# Altium PCB PCB3.PcbDoc
Units mm, origin at the board's own origin, x right, y up, seen from the top; angles counter-clockwise.
Board outline 152.4 x 101.6 mm, 2 copper layers (Top Layer, Bottom Layer); 11 components, 11 nets, 25 pads, 0 vias.
Unrouted connection lines stored in the file: 14.
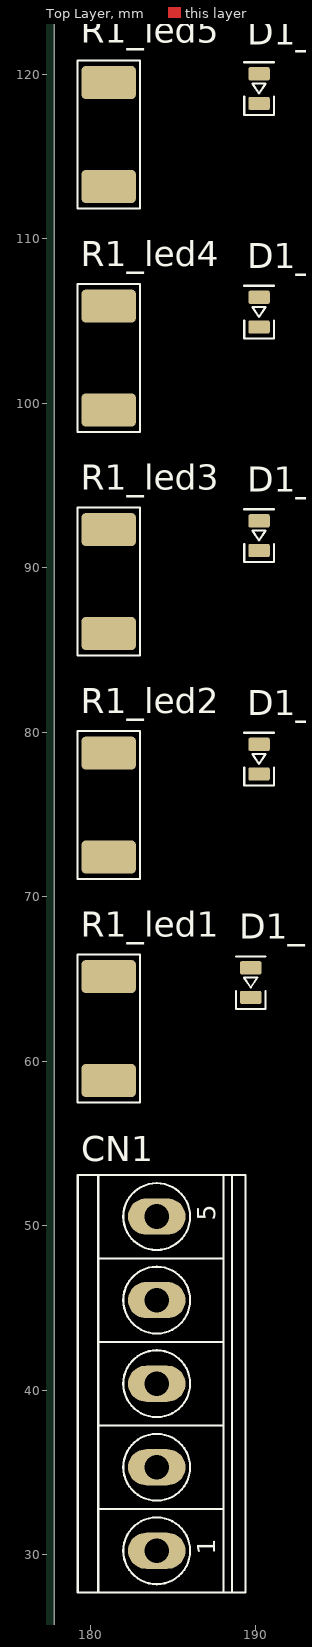
[diagram p0: Top Layer view]
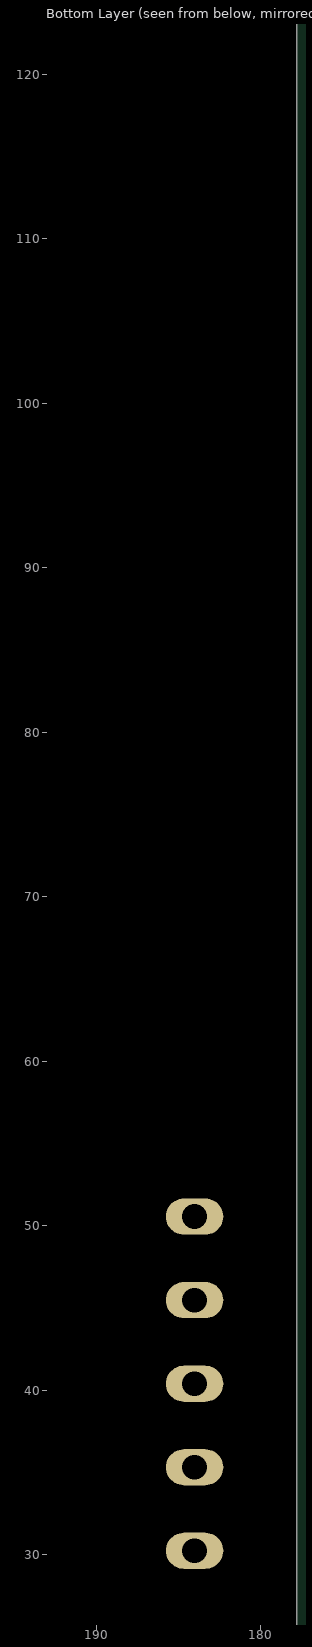
[diagram p1: Bottom Layer view, seen from below]

## Layer stack, top to bottom
Top Solder: solder mask 0.0102, Solder Resist, Dk 3.5
Top Layer: signal copper 0.0356
Dielectric 1: dielectric 0.32, FR-4, Dk 4.8
Bottom Layer: signal copper 0.0356
Bottom Solder: solder mask 0.0102, Solder Resist, Dk 3.5

## Board outline
25.4,25.4 177.8,25.4 177.8,127 25.4,127

## Design rules (kind name [scope] priority, off if disabled: settings)
Clearance [All] p1: gap=0.254 ignorepadtopadclearanceinfootprint=FALSE except(0: Arc-Hole Track-Hole SMDPad-Hole THPad-Hole Via-Hole Fill-Hole Poly-Hole Region-Hole Text-Hole)
PolygonConnect [All] p1: connectstyle=Relief reliefconductorwidth=0.254 reliefentries=4 polygonreliefangle="90 Angle" airgapwidth=0.254
RoutingVias [All] p1: holewidth=0.711 width=1.27 viastyle="Through Hole" minholewidth=0.711 minwidth=1.27 maxholewidth=0.711 maxwidth=1.27
SolderMaskExpansion [All] p1: expansion=0.102 istentingtop=FALSE
Width [All] p1: maxlimit=0.254 minlimit=0.254 preferedwidth=0.254
30 further rules are at their usual default settings.

## Classes and differential pairs
channel class circuito1: led1 led2 led3 led4 led5
net class IN[1..5]: IN1 IN2 IN3 IN4 IN5
component class led5: D1_led5 R1_led5
component class led4: D1_led4 R1_led4
component class led3: D1_led3 R1_led3
component class led2: D1_led2 R1_led2
component class led1: D1_led1 R1_led1
component class Sheet1: CN1

## Components (designator, comment, footprint, x,y, rotation, side; value= is the part's Value field where it differs from the comment)
CN1 "TB-05" TB508-05 184.023,40.386 r90 top
D1_led1 "LED" LED-0805 189.738,64.77 r90 top (schematic designator D1)
D1_led2 "LED" LED-0805 190.246,78.359 r90 top (schematic designator D1)
D1_led3 "LED" LED-0805 190.246,91.948 r90 top (schematic designator D1)
D1_led4 "LED" LED-0805 190.246,105.537 r90 top (schematic designator D1)
D1_led5 "LED" LED-0805 190.246,119.126 r90 top (schematic designator D1)
R1_led1 "1k0" R2512 181.102,61.976 r90 top (schematic designator R1)
R1_led2 "1k0" R2512 181.102,75.565 r90 top (schematic designator R1)
R1_led3 "1k0" R2512 181.102,89.154 r90 top (schematic designator R1)
R1_led4 "1k0" R2512 181.102,102.743 r90 top (schematic designator R1)
R1_led5 "1k0" R2512 181.102,116.332 r90 top (schematic designator R1)

## Footprints (in the part's own frame and the unit in brackets; to place one, negate y for a bottom-side part, rotate by r counter-clockwise, add the part's x,y. Pads: shape width x height; smd on the part's side, far side on the other; paste and mask are expansions set on the pad)
LED-0805 [mm] "SMT LED DIODE 0805"
  rrect25% 0.8x1.3 smd: 1(-0.9,0) 2(0.9,0)
  silkscreen extent -1.6,-0.9 1.6,0.9, body extent -1.01,-0.62 1.01,0.63, height 1.1
R2512 [mm] "SMD RESISTOR 2512"
  rrect25% 2x3.3 smd: 1(-3.159,0) 2(3.16,0)
  silkscreen extent -4.5,-1.9 4.5,1.9, body extent -3.16,-1.6 3.16,1.6, height 0.62
TB508-05 [mm] "Vertical terminal block 0.2 inch (5.08mm) pitch"
  oval 2.2x3.5 hole 1.5: 1(-10.16,0) 2(-5.08,0) 3(0,0) 4(5.08,0) 5(10.16,0)
  silkscreen extent -12.7,-5.4 12.7,4.8, body extent -13.24,-4.78 12.71,4.75, height 15.12

## Part data
CN1: "Terminal Block"
D1_led1 D1_led2 D1_led3 D1_led4 D1_led5: "LED - Light-Emitting Diode"
R1_led1 R1_led2 R1_led3 R1_led4 R1_led5: library part Resistor, "Single resistor", Power=0.125W, Unit price=0.1

## Nets (pads, with @x,y where several pads share a name; then routed paths per layer and width w, separated by ;. In a path a pad name is that pad's centre, name@x,y a point inside that pad or via, vN(x,y) a via of type N, cw(c..) or ccw(c..) an arc to the next point about the centre after c; other vN are vias at no path point)
GND: D1_led1.1 D1_led2.1 D1_led3.1 D1_led4.1 D1_led5.1
IN1: CN1.1 R1_led1.1
IN2: CN1.2 R1_led2.1
IN3: CN1.3 R1_led3.1
IN4: CN1.4 R1_led4.1
IN5: CN1.5 R1_led5.1
NetD1_led1_2: D1_led1.2 R1_led1.2
NetD1_led2_2: D1_led2.2 R1_led2.2
NetD1_led3_2: D1_led3.2 R1_led3.2
NetD1_led4_2: D1_led4.2 R1_led4.2
NetD1_led5_2: D1_led5.2 R1_led5.2

## Text inside footprints (layer, text, board x,y; h text height)
CN1: Top Overlay "1" at 187.579,29.972 h1.1 r90; Top Overlay "5" at 187.579,50.292 h1.1 r90